# EAGLE board BlinkyBoard_stencil (EAGLE 6.4)
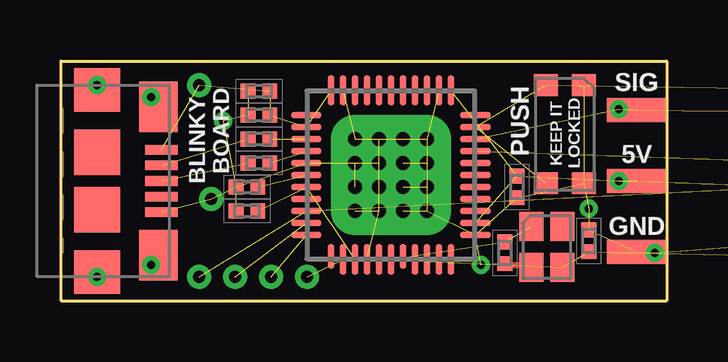
[diagram p0: board, top side]
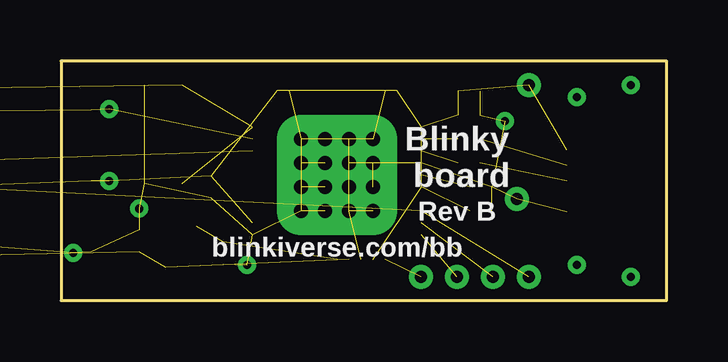
[diagram p1: board, bottom side, seen from below]

Size 25.25 x 10 mm. Coordinates in mm from the lower left corner, seen from the top.
Outline: 0,0 0,10 25.25,10 25.25,0 0,0
Copper layers (1*16): Top 0.035mm / dielectric 1.5mm / Bottom 0.035mm
Design rules "default *": minimum track width 10mil, minimum drill 0.35mm, track to track 8mil, track to pad 8mil, pad to pad 8mil, via to via 8mil, smd to smd 8mil, copper to edge 15mil, drill to drill 8mil, minimum pad ring 10mil, minimum via ring 8mil, stop-mask expansion 4mil, vias tented up to drill 0.35mm, thermal gap 10mil

## Footprints (pad centres in the part's own frame; a part is rotated, then mirrored left to right if it is on the bottom)
CAP_0402_KEMET_MEDIAN = smd 0.62 x 0.62: P$1 -0.45,0; P$2 0.45,0
ALIGNMENT-HOLE-2.5MM = smd 2.5 x 2.5: P$1 0,0 | smd 2.5 x 2.5 bottom: P$2 0,0 | hole 2.5: 0,0
SMT_PAD-5.5MM-4 = smd 0.4 x 4: P$1 -1.875,0; P$2 -0.625,0; P$3 0.625,0; P$4 1.875,0 | smd 1.8 x 2.3: P$5 -4.1,0.85; P$6 4.1,0.85
CRSYTAL_2520 = smd 1.2 x 1: P$1 -0.85,-0.65; P$2 0.85,-0.65; P$3 0.85,0.65; P$4 -0.85,0.65
RES_0402_KEMET_MEDIAN = smd 0.62 x 0.62: P$1 -0.45,0; P$2 0.45,0
GLOWBOARD_KMR211G_SWITCH = smd 0.9 x 1: P$1 -2,0.8; P$2 2.1,0.8; P$3 -2,-0.8; P$4 2.1,-0.8
TEST_VIA_.5MM = drill 0.5 pad 1.016: P$1 0,0
QFN44ML_7X7_LONGLEADS_MOD = smd 1.25 x 0.275: 1 -3.525,2.5; 2 -3.525,2; 3 -3.525,1.5; 4 -3.525,1; 5 -3.525,0.5; 6 -3.525,0; 7 -3.525,-0.5; 8 -3.525,-1; 9 -3.525,-1.5; 10 -3.525,-2; 11 -3.525,-2.5; 23 3.525,-2.5; 24 3.525,-2; 25 3.525,-1.5; 26 3.525,-1; 27 3.525,-0.5; 28 3.525,0; 29 3.525,0.5; 30 3.525,1; 31 3.525,1.5; 32 3.525,2; 33 3.525,2.5 | smd 0.275 x 1: 12 -2.5,-3.4; 18 0.5,-3.4 | smd 0.275 x 1.25: 13 -2,-3.525; 14 -1.5,-3.525; 15 -1,-3.525; 16 -0.5,-3.525; 17 0,-3.525; 19 1,-3.525; 20 1.5,-3.525; 21 2,-3.525; 22 2.5,-3.525; 34 2.5,3.525; 35 2,3.525; 36 1.5,3.525; 37 1,3.525; 38 0.5,3.525; 39 0,3.525; 40 -0.5,3.525; 41 -1,3.525; 42 -1.5,3.525; 43 -2,3.525; 44 -2.5,3.525 | drill 0.6 pad 2: PAD@1 -1.5,1.5; PAD@4 1.5,1.5; PAD@13 -1.5,-1.5; PAD@16 1.5,-1.5 | drill 0.6 pad 2 square: PAD@2 -0.5,1.5; PAD@3 0.5,1.5; PAD@5 -1.5,0.5; PAD@8 1.5,0.5; PAD@9 -1.5,-0.5; PAD@12 1.5,-0.5; PAD@14 -0.5,-1.5; PAD@15 0.5,-1.5 | drill 0.6 pad 1 square: PAD@6 -0.5,0.5; PAD@7 0.5,0.5; PAD@10 -0.5,-0.5; PAD@11 0.5,-0.5
MICRO_USB_FCI = smd 0.4 x 1.35: P$1 -1.3,2.675; P$2 -0.65,2.675; P$3 0,2.675; P$4 0.65,2.675; P$5 1.3,2.675 | smd 2.1 x 1.6: PAD$1 -3.1,2.55; PAD$2 3.1,2.55 | smd 1.8 x 1.9: PAD$3 -3.8,0; PAD$6 3.8,0 | smd 1.9 x 1.9: PAD$4 -1.2,0; PAD$5 1.2,0
WS2811_CONNECTOR = smd 2.5 x 1: 5V 0,0; DATA 0,2.95; GND 0,-2.95

## Placement (x,y rotation side)
C1  10uF  [CAP_0402_KEMET_MEDIAN]  8.25,8.75 180 top
C2  0.1uF  [CAP_0402_KEMET_MEDIAN]  8.25,7.75 180 top
C3  0.1uF  [CAP_0402_KEMET_MEDIAN]  7.75,3.75 180 top
C4  0.1uF  [CAP_0402_KEMET_MEDIAN]  19,4.75 270 top
C5  1uF  [CAP_0402_KEMET_MEDIAN]  7.75,4.75 180 top
C6  18pF  [CAP_0402_KEMET_MEDIAN]  22,2.5 90 top
C7  18pF  [CAP_0402_KEMET_MEDIAN]  18.5,2 270 top
E$1  [ALIGNMENT-HOLE-2.5MM]  -30,-50 0 top  (outside the outline)
E$2  [ALIGNMENT-HOLE-2.5MM]  -10,-50 0 top  (outside the outline)
E$3  [ALIGNMENT-HOLE-2.5MM]  -10,-30 0 top  (outside the outline)
E$4  [ALIGNMENT-HOLE-2.5MM]  -30,-30 0 top  (outside the outline)
E$5  [ALIGNMENT-HOLE-2.5MM]  40,-50 0 top  (outside the outline)
E$6  [ALIGNMENT-HOLE-2.5MM]  60,-50 0 top  (outside the outline)
E$7  [ALIGNMENT-HOLE-2.5MM]  60,-30 0 top  (outside the outline)
E$8  [ALIGNMENT-HOLE-2.5MM]  40,-30 0 top  (outside the outline)
E$9  [ALIGNMENT-HOLE-2.5MM]  110,-50 0 top  (outside the outline)
E$10  [ALIGNMENT-HOLE-2.5MM]  130,-50 0 top  (outside the outline)
E$11  [ALIGNMENT-HOLE-2.5MM]  130,-30 0 top  (outside the outline)
E$12  [ALIGNMENT-HOLE-2.5MM]  110,-30 0 top  (outside the outline)
E$13  [ALIGNMENT-HOLE-2.5MM]  -30,40 0 top  (outside the outline)
E$14  [ALIGNMENT-HOLE-2.5MM]  -10,40 0 top  (outside the outline)
E$15  [ALIGNMENT-HOLE-2.5MM]  -10,60 0 top  (outside the outline)
E$16  [ALIGNMENT-HOLE-2.5MM]  -30,60 0 top  (outside the outline)
E$17  [ALIGNMENT-HOLE-2.5MM]  40,40 0 top  (outside the outline)
E$18  [ALIGNMENT-HOLE-2.5MM]  60,40 0 top  (outside the outline)
E$19  [ALIGNMENT-HOLE-2.5MM]  60,60 0 top  (outside the outline)
E$20  [ALIGNMENT-HOLE-2.5MM]  40,60 0 top  (outside the outline)
E$21  [ALIGNMENT-HOLE-2.5MM]  110,40 0 top  (outside the outline)
E$22  [ALIGNMENT-HOLE-2.5MM]  130,40 0 top  (outside the outline)
E$23  [ALIGNMENT-HOLE-2.5MM]  130,60 0 top  (outside the outline)
E$24  [ALIGNMENT-HOLE-2.5MM]  110,60 0 top  (outside the outline)
JP1  [SMT_PAD-5.5MM-4]  72,5 90 top  (outside the outline)
Q1  16 MHz  [CRSYTAL_2520]  20.25,2.25 270 top
R1  22  [RES_0402_KEMET_MEDIAN]  8.25,5.75 0 top
R2  22  [RES_0402_KEMET_MEDIAN]  8.25,6.75 0 top
S1  Normally open  [GLOWBOARD_KMR211G_SWITCH]  21,7 270 top
U$1  TEST_VIA  [TEST_VIA_.5MM]  8.75,1 0 top
U$2  ARDUINO_LEONARDO-REV3B_SMARTPRJ_ATMEGA32U4-XUMU_MODDED  [QFN44ML_7X7_LONGLEADS_MOD]  13.75,5.25 0 top
U$3  TEST_VIA  [TEST_VIA_.5MM]  7.25,1 0 top
U$4  MICRO_USB  [MICRO_USB_FCI]  1.5,5 270 top
U$5  TEST_VIA  [TEST_VIA_.5MM]  5.75,1 0 top
U$6  TEST_VIA  [TEST_VIA_.5MM]  10.25,1 0 top
U$7  TEST_VIA  [TEST_VIA_.5MM]  6.25,4.25 0 top
U$8  TEST_VIA  [TEST_VIA_.5MM]  5.75,9 0 top
U$9  [OSHW-LOGO-M]  89,5 0 bottom  (outside the outline)
WS1  WS2811_CONNECTOR  [WS2811_CONNECTOR]  24,5 0 top
WS3  WS2811_CONNECTOR  [WS2811_CONNECTOR]  94,5 0 top  (outside the outline)

## Library data of the parts
C1-C7 JP1 Q1 R1 R2 U$1-U$9 WS1 WS3 = blinkiverse
E$1-E$24 = Hoektronics
S1 = blinkyboard

## Nets
ANALOG_IN: JP1.P$2 U$2.30
AREF: U$2.42
D+: R1.P$2 U$2.4
D+_IN: R1.P$1 U$4.P$3
D-: R2.P$2 U$2.3
D-_IN: R2.P$1 U$4.P$2
GND: C1.P$2 C2.P$2 C3.P$2 C4.P$2 C5.P$2 C6.P$2 C7.P$2 JP1.P$3 S1.P$1 S1.P$2 U$2.5 U$2.15 U$2.23 U$2.35 U$2.43 U$2.PAD@1 U$2.PAD@2 U$2.PAD@3 U$2.PAD@4 U$2.PAD@5 U$2.PAD@6 U$2.PAD@7 U$2.PAD@8 U$2.PAD@9 U$2.PAD@10 U$2.PAD@11 U$2.PAD@12 U$2.PAD@13 U$2.PAD@14 U$2.PAD@15 U$2.PAD@16 U$4.P$5 U$7.P$1 WS1.GND WS3.GND
LED_DATA: U$2.31 WS1.DATA WS3.DATA
MISO: U$1.P$1 U$2.11
MOSI: U$2.10 U$3.P$1
N$2: C5.P$1 U$2.6
N$8: C6.P$1 Q1.P$3 U$2.16
N$9: C7.P$1 Q1.P$1 U$2.17
N$10: S1.P$3 S1.P$4 U$2.32
RST: U$2.13 U$6.P$1
SCK: JP1.P$4 U$2.9 U$5.P$1
VCC: C1.P$1 C2.P$1 C3.P$1 C4.P$1 JP1.P$1 U$2.2 U$2.7 U$2.14 U$2.24 U$2.34 U$2.44 U$4.P$1 U$8.P$1 WS1.5V WS3.5V

## Tracks (layer width: path | path; a pad name or v marks a point on that pad's centre or on a via)
ANALOG_IN  (via drill 0.35)  (2 unrouted)
  other vias: 88.75,6.25
D+  (1 unrouted)
D+_IN  (1 unrouted)
D-  (1 unrouted)
D-_IN  (1 unrouted)
GND  (via drill 0.35)  (40 unrouted)
  other vias: 6.75,7.5 93.25,2 24.75,2 75.5,2.2 17.5,1.5 22,3.85
  pour Bottom (isolate 0.254): 75.75,10 92.5,10 92.5,0 75.75,0
LED_DATA  (via drill 0.35)  (6 unrouted)
  other vias: 89.25,7.25 91.75,6 23.25,8 94.75,8
MISO  (1 unrouted)
MOSI  (1 unrouted)
N$1
  Top 0.254: 18.5,1.5 19.5,1.5
N$2  (1 unrouted)
N$3  (via drill 0.35)
  other vias: 1.5,9
N$4  (via drill 0.35)
  other vias: 1.5,1
N$5  (via drill 0.35)
  other vias: 3.75,8.5
N$6  (via drill 0.35)
  other vias: 3.75,1.5
N$7
  Top 0.05: 0,10 25.25,10 25.25,0 0,0 0,10
N$8  (via drill 0.35)  (4 unrouted)
  other vias: 83.25,0.7 92,1
N$9  (2 unrouted)
N$10  (via drill 0.35)  (4 unrouted)
  other vias: 88.5,8 90.75,7.75
RST  (1 unrouted)
SCK  (2 unrouted)
VCC  (via drill 0.35)  (21 unrouted)
  other vias: 82.25,0.7 76.75,2.75 79.75,9 88,9 94.75,5 23.25,5 75.5,6.5
(copper drawn outside any net)
  shapes: Bottom area x2

## Text on the board
tNames: SIG | PUSH | BLINKY | BOARD | KEEP IT / LOCKED | 5V | GND
bNames: Blinky / board | Rev B | blinkiverse.com/bb